# Altium PCB H Bridge.PcbDoc
Units mil, origin at the board's own origin, x right, y up, seen from the top; angles counter-clockwise.
Board outline 2355 x 1250 mil, 2 copper layers (Top Layer, Bottom Layer); 18 components, 11 nets, 43 pads, 6 vias.
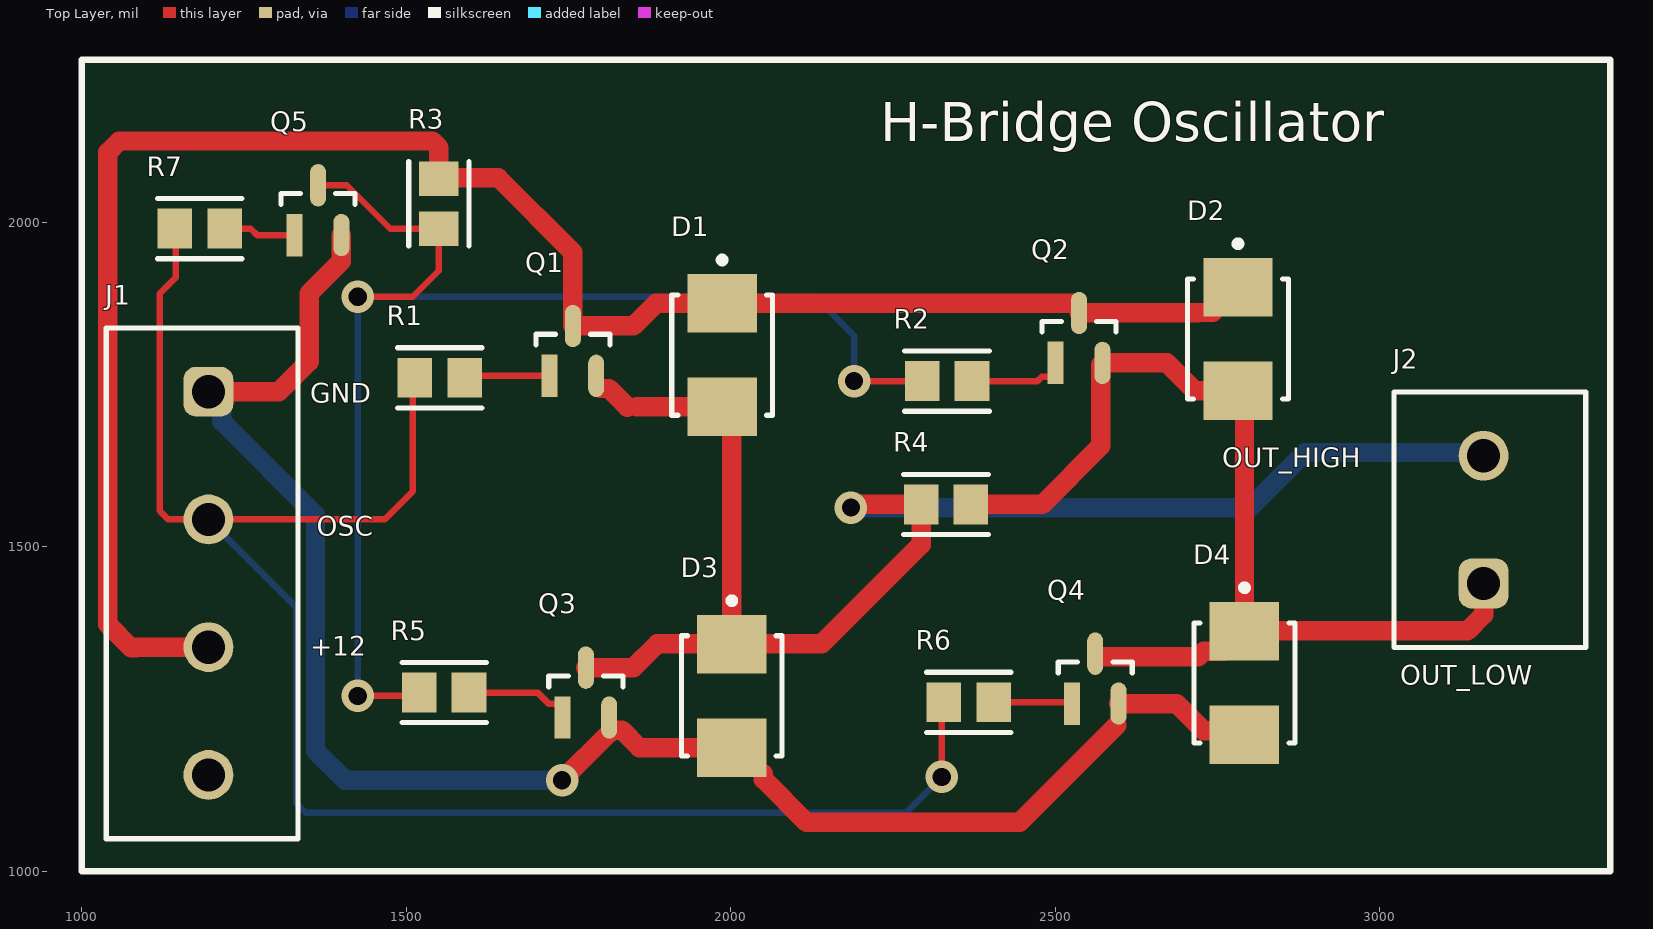
[diagram p0: Top Layer view]
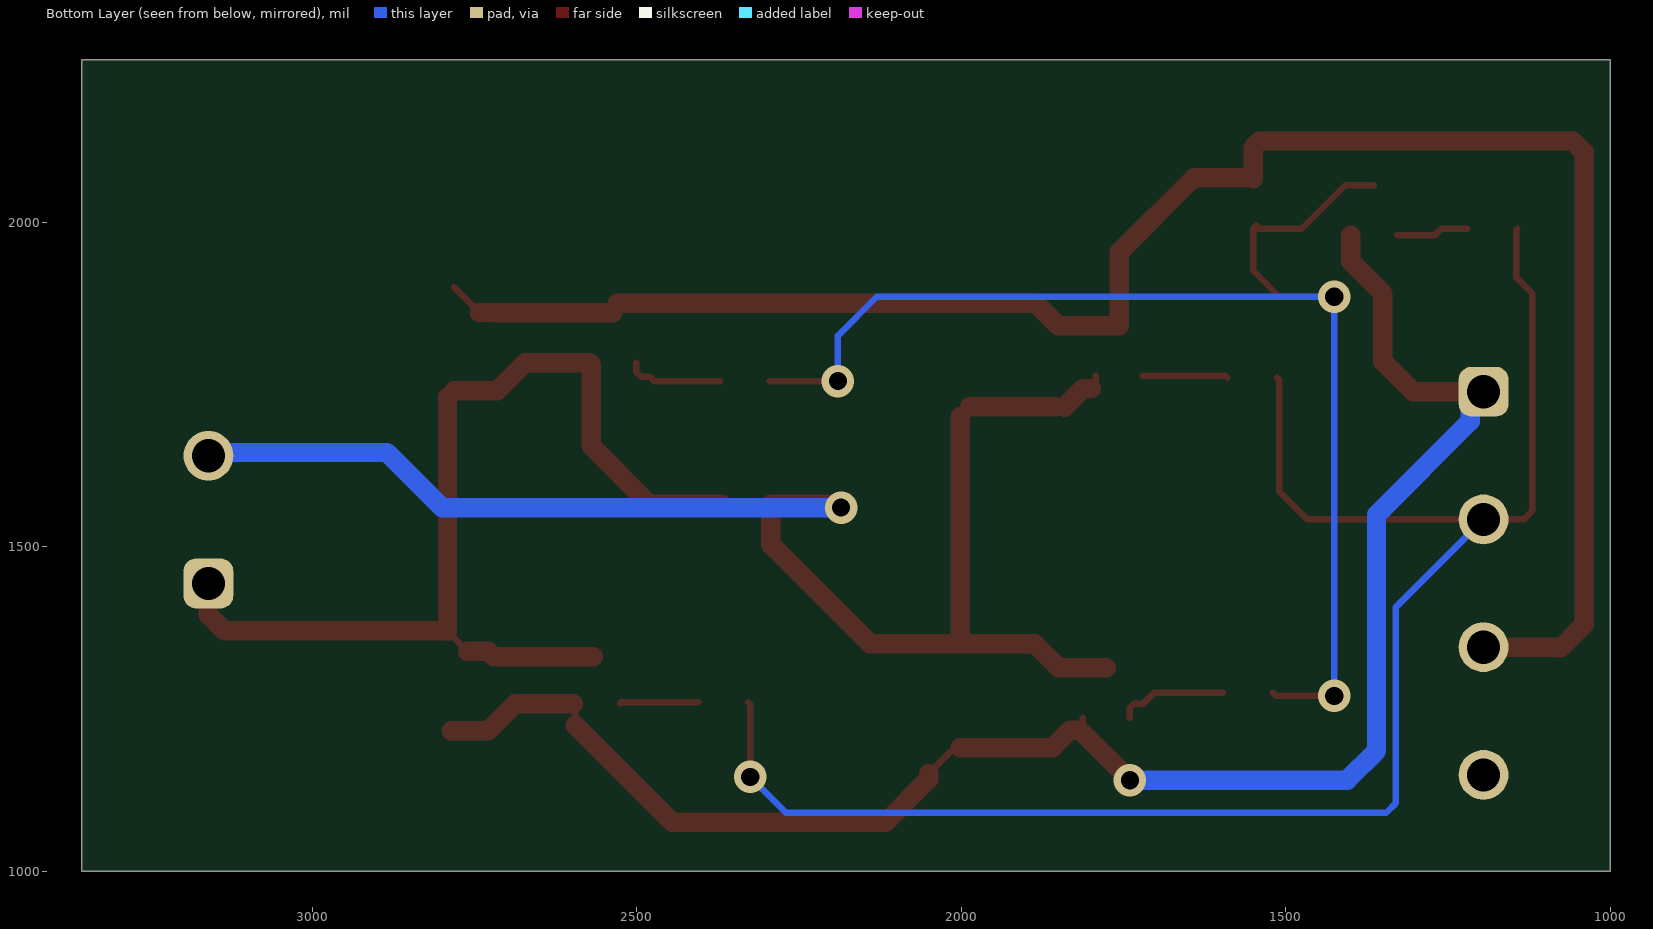
[diagram p1: Bottom Layer view, seen from below]
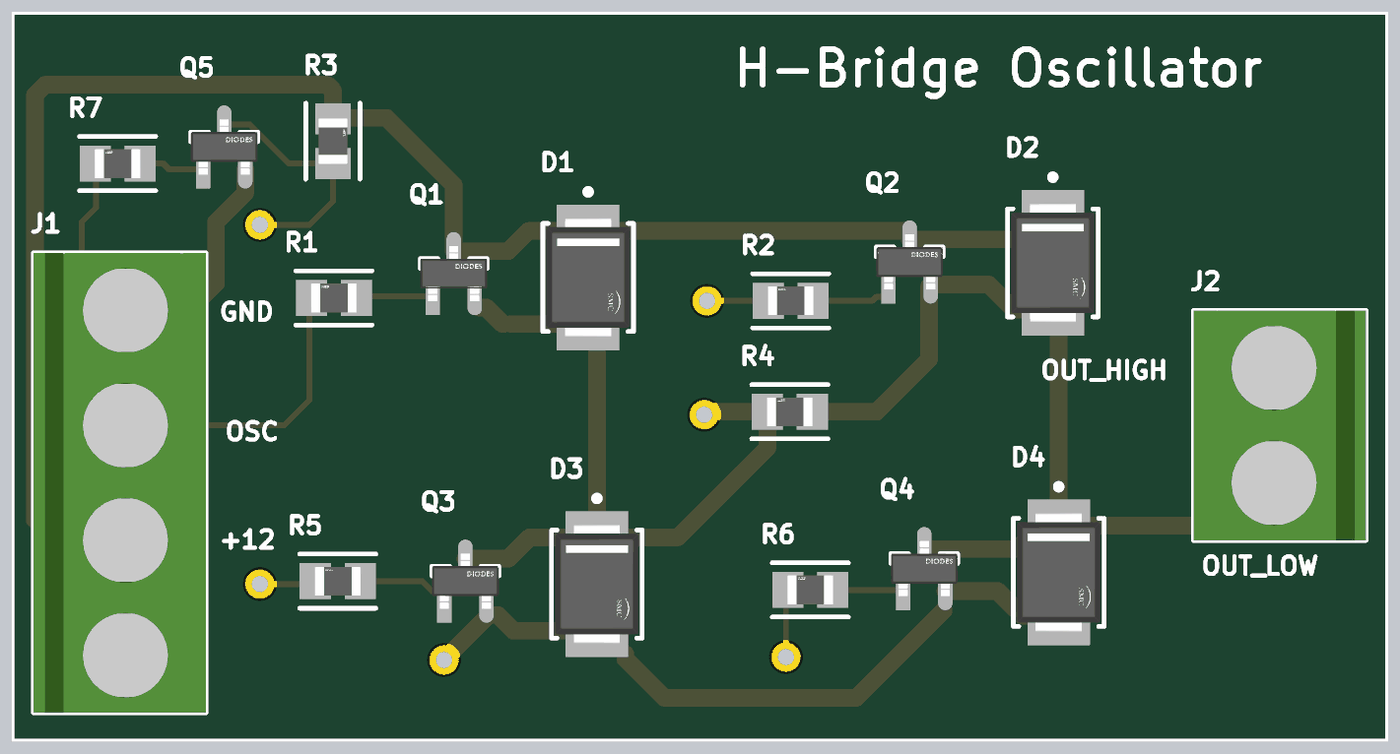
[diagram p2: 3D render of the assembled board from above, using the file's embedded part models]

## Layer stack, top to bottom
Top Solder: solder mask 0.4, Solder Resist, Dk 3.5
Top Layer: signal copper 1.4
Dielectric 1: dielectric 12.6, FR-4, Dk 4.8
Bottom Layer: signal copper 1.4
Bottom Solder: solder mask 0.4, Solder Resist, Dk 3.5

## Board outline
1000,1000 1000,2250 3355,2250 3355,1000

## Design rules (kind name [scope] priority, off if disabled: settings)
Clearance [All] p1: gap=10 ignorepadtopadclearanceinfootprint=FALSE
PolygonConnect [All] p1: connectstyle=Relief reliefconductorwidth=10 reliefentries=4 polygonreliefangle="90 Angle" airgapwidth=10
RoutingVias [All] p1: holewidth=28 width=50 viastyle="Through Hole" minholewidth=28 minwidth=50 maxholewidth=28 maxwidth=50
SolderMaskExpansion [All] p1: expansion=4 istentingtop=FALSE
SupplyNets "Schematic Supply Nets_1" [InNet('+12')] p1: voltage=0.000
SupplyNets "Schematic Supply Nets" [InNet('GND')] p2: voltage=0.000
Width [All] p1: maxlimit=30 minlimit=10 preferedwidth=10
30 further rules are at their usual default settings.

## Components (designator, comment, footprint, x,y, rotation, side; value= is the part's Value field where it differs from the comment)
D1 "SK520B" FP-SMB-MFG 1986.59,1795 r270 top
D2 "SK520B" FP-SMB-MFG 2781.59,1820 r270 top
D3 "SK520B" FP-SMB-MFG 2001.59,1270 r270 top
D4 "SK520B" FP-SMB-MFG 2791.59,1290 r270 top
J1 "691137710004" 691137710004 1185.16,1443.43 r270 top
J2 "691137710002" 691137710002 3169.84,1541.57 r90 top
Q1 "MMBT3904-7-F" FP-SOT23-IPC_A 1756.59,1801.55 r90 top
Q2 "MMBT3904-7-F" FP-SOT23-IPC_A 2536.59,1821.55 r90 top
Q3 "MMBT3904-7-F" FP-SOT23-IPC_A 1776.59,1275 r90 top
Q4 "MMBT3904-7-F" FP-SOT23-IPC_A 2561.59,1296.55 r90 top
Q5 "MMBT3904-7-F" FP-SOT23-IPC_A 1363.98,2018.45 r90 top
R1 "RR1220P-103-D" FP-RR1220-IPC_A 1551.59,1760 r180 top
R2 "RR1220P-103-D" FP-RR1220-IPC_A 2333.18,1755 r180 top
R3 "RR1220P-102-D" FP-RR1220-IPC_A 1550,2028.41 r90 top
R4 "RR1220P-103-D" FP-RR1220-IPC_A 2331.59,1565 r180 top
R5 "RR1220P-103-D" FP-RR1220-IPC_A 1558.18,1275 r180 top
R6 "RR1220P-103-D" FP-RR1220-IPC_A 2366.59,1260 r180 top
R7 "RR1220P-103-D" FP-RR1220-IPC_A 1181.59,1990 r180 top

## Footprints (in the part's own frame and the unit in brackets; to place one, negate y for a bottom-side part, rotate by r counter-clockwise, add the part's x,y. Pads: shape width x height; smd on the part's side, far side on the other; paste and mask are expansions set on the pad)
691137710002 [mm] "Horizontal Cable Entry with Pressure Clamp, pitch 5mm, 02p"
  rrect50% 1.95x1.95 hole 1.3: 1(-2.5,0.25)
  round 1.95 hole 1.3: 2(2.5,0.25)
  silkscreen extent -5,-3.75 5,3.75, body extent -5,-3.75 5,3.75, height 11.6
691137710004 [mm] "Horizontal Cable Entry with Pressure Clamp, pitch 5mm, 04p"
  rrect50% 1.95x1.95 hole 1.3: 1(-7.5,0.25)
  round 1.95 hole 1.3: 2(-2.5,0.25) 3(2.5,0.25) 4(7.5,0.25)
  silkscreen extent -10,-3.75 10,3.75, body extent -10,-3.75 10,3.75, height 11.6
FP-RR1220-IPC_A [mil]
  rect 53.34x61.27 smd paste+0 mask+0: 1(-38.41,0) 2(38.41,0)
  silkscreen extent -65,-46 65,46, body extent -85,-50 85,50, height 10
FP-SMB-MFG [mm]
  rect 2.29x2.72 smd paste+0 mask+0: 1(-2.025,0) 2(2.025,0)
  silkscreen extent -3.85,-1.97 2.35,1.97, body extent -3.27,-2.07 3.27,2.07, height 0.25
FP-SOT23-IPC_A [mm]
  rect 1.659x0.627 smd paste+0 mask+0: 1(-0.977,0.915)
  rrect100% 1.659x0.627 smd paste+0 mask+0: 2(-0.977,-0.915) 3(0.977,0)
  silkscreen extent 0.23,-1.45 0.65,1.45, body extent -2.31,-1.95 2.31,1.95, height 0.25

## Part data
D1 D2 D3 D4: library part CMP-10078-124483505-1, "SK520B Diode Schottky 200V 5A Smb", Capacitance=140pF, Case/Package=SMB, Forward Current=5A, Max Forward Surge Current (Ifsm)=110A, Max Junction Temperature (Tj)=150°C, Max Repetitive Reverse Voltage (Vrrm)=200V, Min Operating Temperature=-55°C, Peak Reverse Current=200nA, Height=2.6mm, Max Operating Temperature=150°C, NexarPartId=124483505, Reverse Voltage=200V
J1: library part CMP-1502-03326-2, Lead Pitch=5mm, NexarPartId=78871140, Number of Pins=4, Packaging=Box, RoHS=Non-Compliant
J2: library part CMP-1502-03324-2, Current Rating=16A, Max Operating Temperature=120°C, Min Operating Temperature=-30°C, Voltage Rating=300V, Contact Material="Nickel, Tin", Height=11.6mm, Lead Pitch=5mm, NexarPartId=78871135, Number of Contacts=2, Number of Pins=2, Number of Rows=1, Packaging=Box, RoHS=Non-Compliant
Q1 Q2 Q3 Q4 Q5: library part CMP-2000-04931-2, "TRANS NPN 40V 0.2A SMD SOT23-3", Case/Package=SOT-23, Collector Base Voltage (VCBO)=60V, Collector Emitter Breakdown Voltage=40V, Collector Emitter Saturation Voltage=300mV, Continuous Collector Current=200mA, Emitter Base Voltage (VEBO)=6V, Frequency=300MHz, Max Operating Temperature=150°C, Max Power Dissipation=300mW, Min Operating Temperature=-55°C, Package Quantity=3000, Power Dissipation=350mW, Collector Emitter Voltage (VCEO)=40V, Contact Plating=Tin, Element Configuration=Single, Gain Bandwidth Product=300MHz, Height=1mm, hFE Min=100, Lead Free="Lead Free", Length=3.05mm, Max Breakdown Voltage=40V, Max Collector Current=200mA, Max Frequency=300MHz, Mount="Surface Mount", Number of Elements=1, Number of Pins=3, Packaging="Tape and Reel", Polarity=NPN, Radiation Hardening=No, REACH SVHC="No SVHC", Transition Frequency=300MHz, Voltage Rating (DC)=40V, Weight=0.000282oz, Width=1.4mm
R1 R2 R4 R5 R6 R7: library part CMP-2001-03215-2, "10kΩ ±0.5% 0.1W 1/10W Chip Resistor 0805 (2012 Metric) Thin Film", Case Code (Imperial)=0805, Case Code (Metric)=2012, Max Operating Temperature=125°C, Max Power Dissipation=100mW, Min Operating Temperature=-55°C, Package Quantity=1, Resistance=10kR, Resistance Tolerance=0.5%, Resistor Type="Thin Film", Temperature Coefficient=25ppm/°C, Voltage Rating=100V, Case/Package=0805, Depth=1.25mm, Height=0.4mm, Lead Free="Lead Free", Length=2mm, Number of Terminations=2, Packaging="Tape and Reel", Power Rating=100mW, RoHS Compliant=Yes, Series=RR, Size Code=0805, Technology="THIN FILM", Termination=SMD/SMT, Tolerance=0.5%, Voltage Rating (DC)=100V, Weight=0.000194oz, Width=1.25mm
R3: library part CMP-2001-03210-2, "1kΩ ±0.5% 0.1W 1/10W Chip Resistor 0805 (2012 Metric) Thin Film", Case Code (Imperial)=0805, Case Code (Metric)=2012, Max Operating Temperature=125°C, Max Power Dissipation=100mW, Min Operating Temperature=-55°C, Package Quantity=1, Resistance=1kR, Resistance Tolerance=0.5%, Resistor Type="Thin Film", Temperature Coefficient=25ppm/°C, Voltage Rating=100V, Case/Package=0805, Depth=1.25mm, Height=0.4mm, Lead Free="Lead Free", Length=2mm, Number of Terminations=2, Packaging="Tape and Reel", Power Rating=100mW, RoHS Compliant=Yes, Series=RR, Size Code=0805, Technology="THIN FILM", Termination=SMD/SMT, Tolerance=0.5%, Voltage Rating (DC)=100V, Width=1.25mm

## Via types
v1: diameter 50, hole 28, Top Layer to Bottom Layer, 6 vias

## Nets (pads, with @x,y where several pads share a name; then routed paths per layer and width w, separated by ;. In a path a pad name is that pad's centre, name@x,y a point inside that pad or via, vN(x,y) a via of type N, cw(c..) or ccw(c..) an arc to the next point about the centre after c; other vN are vias at no path point)
+12: D1.1 D2.1 J1.3 Q1.3 Q2.3 R3.2 | length 2902.4
  Top Layer w10: 1084.14,1344.14 1085,1345 ; R3.2 R3.2@1551.59,2068.41 ; D1.1 D1.1@1986.86,1875 ; 2515,1875 2515.11,1874.89 ; Q2.3@2529.81,1874.89 2536.59,1868.11 Q2.3 ; D2.1@2742.6,1860.74 D2.1
  Top Layer w30: 1084.14,1344.14 1075.86,1344.14 1040,1380 1040,2107.43 1057.57,2125 1458.41,2125 1540,2125 1550,2115 R3.2 ; 1085,1345 J1.3 ; R3.2@1551.59,2068.41 1641.59,2068.41 1756.59,1953.41 Q1.3 1850,1840 1884.72,1874.72 D1.1 ; D1.1@1986.86,1875 2515,1875 ; 2515.11,1874.89 Q2.3@2529.81,1874.89 ; Q2.3 2720,1860 2720.74,1860.74 D2.1@2742.6,1860.74
GND: D3.2 D4.2 J1.1 Q3.2 Q4.2 Q5.2 | length 2696.4
  Top Layer w10: Q3.2@1812.61,1212.61 Q3.2@1812.61,1223.84 ; Q3.2 Q3.2@1812.61,1223.84 ; Q3.2@1819.39,1217.06 Q3.2@1812.61,1223.84 ; D3.2@2001.31,1190 D3.2 2010.05,1190.28 D3.2@2050.13,1150.2 ; 2594.8,1224.8 2594.8,1255.29 Q4.2 ; D4.2@2785.77,1216.1 D4.2
  Top Layer w30: J1.1 1303.7,1738.7 1350,1785 1350,1890 1400,1940 Q5.2 ; v1(1740,1140) Q3.2@1812.61,1212.61 ; Q3.2@1819.39,1217.06 1832.1,1217.06 1859.16,1190 D3.2@2001.31,1190 ; D3.2@2050.13,1150.2 2050.13,1141.73 2116.86,1075 2445,1075 2594.8,1224.8 ; Q4.2 2686.91,1258.09 2728.9,1216.1 D4.2@2785.77,1216.1
  Bottom Layer w30: J1.1 1215.8,1717.9 1215.8,1693.1 1360,1548.9 1360,1185.2 1405.2,1140 v1(1740,1140)
NetQ1_1: Q1.1 R1.1 | length 131.8
  Top Layer w10: R1.1 1593.09,1763.09 Q1.1
NetQ2_1: Q2.1 R2.1 | length 148.9
  Top Layer w10: R2.1 2472.47,1755 2479.08,1761.61 2493.23,1761.61 2500.57,1768.95 Q2.1
NetQ3_1: Q3.1 R5.1 | length 168.2
  Top Layer w10: R5.1 1702.11,1275 1719.08,1258.03 1733.23,1258.03 1740.57,1250.69 Q3.1
NetQ4_1: Q4.1 R6.1 | length 121.4
  Top Layer w10: R6.1 2523.66,1260 Q4.1
NetQ5_1: Q5.1 R7.1 | length 112.1
  Top Layer w10: R7.1 1260,1990 1270,1980 Q5.1
O\S\C\: Q5.3 R2.2 R3.1 R5.2 | length 2103.8
  Top Layer w10: Q5.3 1408.09,2056.91 1475,1990 R3.1 ; v1(1425,1270) 1514.77,1270 R5.2 ; v1(1425,1885) 1510,1885 1550,1925 R3.1 ; R3.1@1545,1995 R3.1 ; v1(2190,1755) R2.2
  Bottom Layer w10: v1(1425,1270) v1(1425,1885) 2130,1885 2190,1825 v1(2190,1755)
OSC: J1.2 R1.2 R6.2 R7.2 | length 2668.8
  Top Layer w10: R7.2 1145,1988.18 1145,1915 1120,1890 1120,1555 1133.15,1541.85 J1.2 1466.85,1541.85 1510,1585 1510,1756.82 R1.2 ; v1(2325,1145) 2325,1256.82 R6.2
  Bottom Layer w10: J1.2 1330,1406.85 1330,1105 1345,1090 2270,1090 v1(2325,1145)
OUT_HIGH: D1.2 D3.1 J2.2 Q1.2 Q3.3 R4.2 | length 2373.1
  Top Layer w10: Q1.2 1792.61,1750.39 Q1.2@1799.39,1743.61 ; 1840.71,1715 1855,1715 1855.28,1715.28 ; D1.2 D1.2@2001.59,1700.28 ; v1(2185,1560) v1@2190,1565 ; D3.1@2001.31,1350 2001.59,1350 D3.1 D3.1@2001.31,1350
  Top Layer w30: Q3.3 1850.04,1313.45 1886.59,1350 D3.1@2001.31,1350 ; Q1.2@1799.39,1743.61 1812.1,1743.61 1840.71,1715 ; 1855.28,1715.28 D1.2 ; D1.2@2001.59,1700.28 2001.59,1350 2140,1350 2293.18,1503.18 R4.2 v1@2190,1565
  Bottom Layer w10: J2.2@3155,1645 J2.2
  Bottom Layer w30: v1(2185,1560) 2800,1560 2885,1645 J2.2@3155,1645
OUT_LOW: D2.2 D4.1 J2.1 Q2.2 Q4.3 R4.1 | length 1643.4
  Top Layer w10: Q4.3 Q4.3@2566.59,1330 ; Q2.2@2570,1780.48 Q2.2 ; D4.1@2760.77,1338.9 D4.1 D4.1@2791.86,1370 ; D2.2 D2.2@2791.59,1730.28
  Top Layer w30: R4.1 2480,1565 2570,1655 Q2.2@2570,1780.48 ; Q4.3@2566.59,1330 2720,1330 2728.9,1338.9 D4.1@2760.77,1338.9 ; Q2.2 2671.91,1783.09 2714.72,1740.28 D2.2 ; D4.1 D2.2@2791.59,1730.28 ; D4.1@2791.86,1370 3135,1370 3160,1395 J2.1
pads on no net: J1.4

## Silkscreen, mask and mechanical layers (free items; w line width, h text height)
Top Overlay:
  the board outline again, w10
  text "H-Bridge Oscillator" at 2230,2124.99 h60
  text "GND" at 1352,1722 h30
  text "OUT_HIGH" at 2757,1622 h30
  text "OSC" at 1362,1517 h30
  text "+12" at 1352,1332 h30
  text "OUT_LOW" at 3032,1287 h30